# EAGLE board FGPMMOPA6x (EAGLE 6.3)
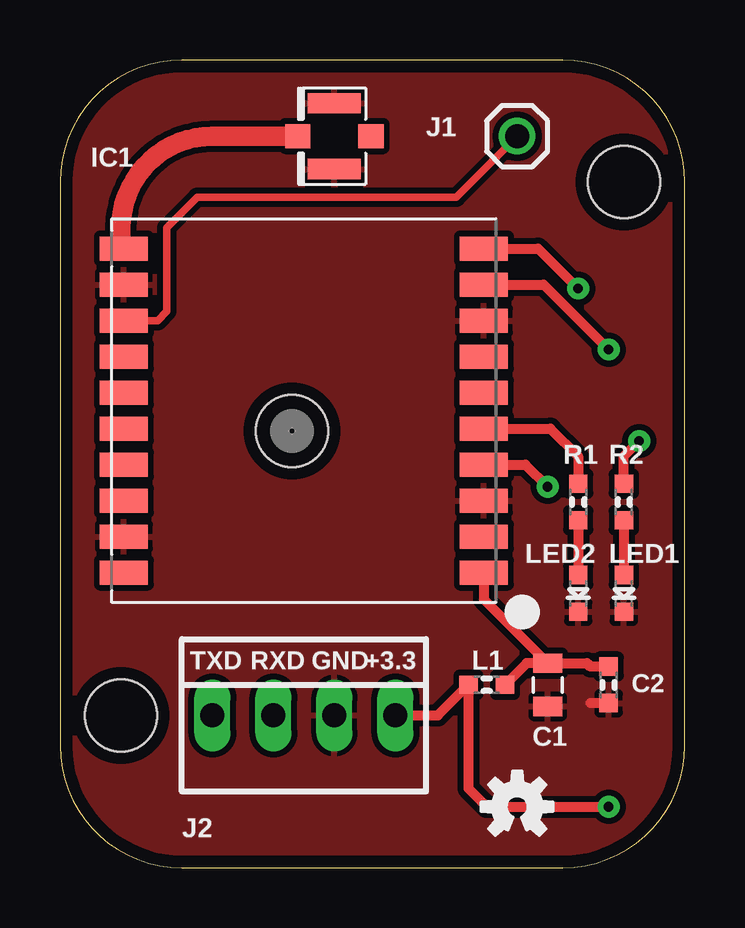
[diagram p0: board, top side]
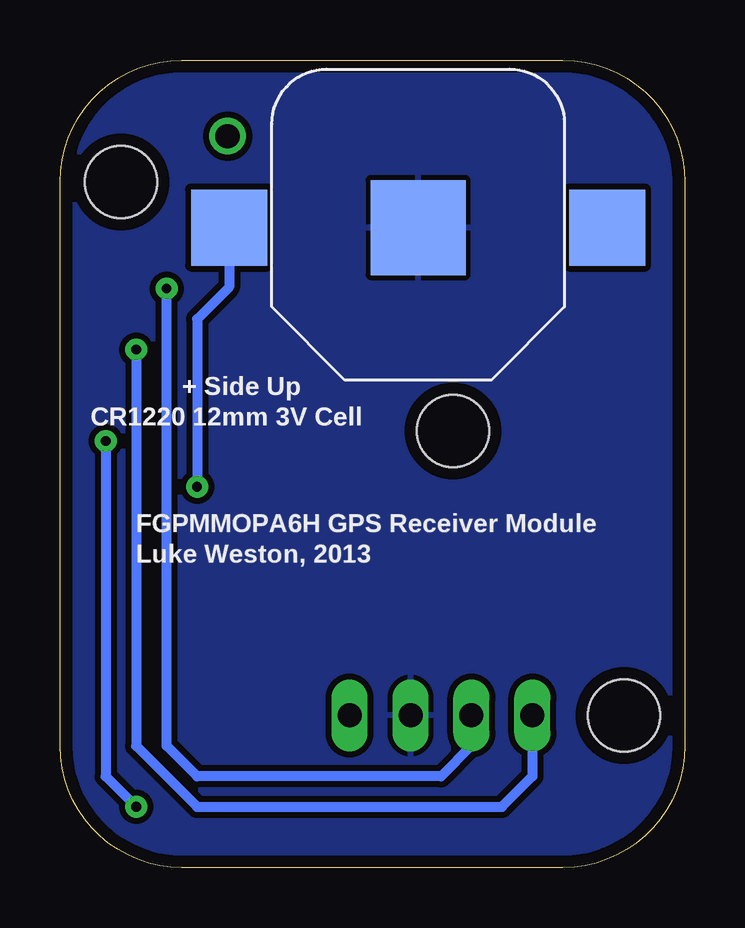
[diagram p1: board, bottom side, seen from below]

Size 26.04 x 33.65 mm. Coordinates in mm from the lower left corner, seen from the top.
Outline: 20.96,33.65 5.08,33.65 arc90 0,28.57 0,5.08 arc90 5.08,0 20.96,0 arc90 26.04,5.08 26.04,28.57 arc90 20.96,33.65
Copper layers (1*16): Top 0.035mm / dielectric 1.5mm / Bottom 0.035mm
Design rules "PCBCart-Standard *": minimum track width 8mil, minimum drill 0.4mm, track to track 8mil, track to pad 8mil, pad to pad 8mil, via to via 8mil, smd to smd 8mil, copper to edge 20mil, drill to drill 8mil, minimum pad ring 8mil, minimum via ring 10mil, stop-mask expansion 3mil, vias tented up to drill 16mil, thermal gap 8mil
Holes 3 mm at 2.54,6.35 23.5,28.57

## Footprints (pad centres in the part's own frame; a part is rotated, then mirrored left to right if it is on the bottom)
BATTCON_12MM = smd 3.962 x 3.962: GND 0,0 | smd 3.175 x 3.175: PWR@1 -7.874,0; PWR@2 7.874,0
0805 = smd 0.8 x 1.2: 1 -0.9,0; 2 0.9,0
0603 = smd 0.762 x 0.762: 1 -0.762,0; 2 0.762,0
FGPMMOPA6H = smd 2 x 1: P$1 -7.5,6.75; P$2 -7.5,5.25; P$3 -7.5,3.75; P$4 -7.5,2.25; P$5 -7.5,0.75; P$6 -7.5,-0.75; P$7 -7.5,-2.25; P$8 -7.5,-3.75; P$9 -7.5,-5.25; P$10 -7.5,-6.75; P$11 7.5,-6.75; P$12 7.5,-5.25; P$13 7.5,-3.75; P$14 7.5,-2.25; P$15 7.5,-0.75; P$16 7.5,0.75; P$17 7.5,2.25; P$18 7.5,3.75; P$19 7.5,5.25; P$20 7.5,6.75 | hole 3: 0.5,0.85
1X01 = drill 1.016: 1 0,0
22-23-2041 = drill 1 long: 1 -3.81,0; 2 -1.27,0; 3 1.27,0; 4 3.81,0
U.FL = smd 2.2 x 0.85: P$1 0,1.375; P$2 0,-1.375 | smd 1.05 x 1: P$3 1.525,0; P$4 -1.525,0
LED-0603 = smd 0.762 x 0.762: A -0.762,0; C 0.762,0

## Placement (x,y rotation side)
B1  Keystone 3000  [BATTCON_12MM]  11.11,26.67 0 bottom
C1  10µF  [0805]  20.32,7.62 90 top
C2  100nF  [0603]  22.86,7.62 90 top
IC1  FGPMMOPA6H  [FGPMMOPA6H]  10.16,19.05 180 top
J1  PPS  [1X01]  19.05,30.48 0 top
J2  Interface  [22-23-2041]  10.16,6.35 0 top
J3  U.FL  [U.FL]  11.43,30.48 180 top
L1  Bead  [0603]  17.78,7.62 180 top
LED1  Power  [LED-0603]  23.5,11.43 270 top
LED2  Status  [LED-0603]  21.59,11.43 270 top
R1  1kΩ  [0603]  21.59,15.24 90 top
R2  1kΩ  [0603]  23.5,15.24 90 top
SY  OSHW-LOGOS  [OSHW-LOGO-S]  19.05,2.54 0 top

## Library data of the parts
B1 SY = SparkFun
C1 = freetronics-master-v1; PACKAGE: 0805
C2 L1 R1 R2 = freetronics-master-v1; PACKAGE: 0603
IC1 J3 = microbuilder
J1 = freetronics-master-v1
J2 = con-molex; MF: MOLEX; MPN: 22-23-2041; OC_FARNELL: 1462920; OC_NEWARK: 38C0355
LED1 = freetronics-master-v1; COLOUR: Blue; PACKAGE: 0603
LED2 = freetronics-master-v1; COLOUR: Yellow; PACKAGE: 0603

## Nets
+3V3: J2.4 L1.2 R2.2
GND: B1.GND C1.1 C2.1 IC1.P$3 IC1.P$8 IC1.P$12 IC1.P$19 J2.3 J3.P$1 J3.P$2 LED1.C LED2.C
N$8: C1.2 C2.2 IC1.P$1 L1.1
N$10: B1.PWR@1 IC1.P$4
N$13: IC1.P$5 R1.2
N$14: IC1.P$9 J2.1
N$15: IC1.P$10 J2.2
N$16: IC1.P$13 J1.1
N$17: IC1.P$11 J3.P$3
N$19: LED2.A R1.1
N$20: LED1.A R2.1

## Tracks (layer width: path | path; a pad name or v marks a point on that pad's centre or on a via)
+3V3  (via drill 0.4)
  Top 0.406: R2.2 23.5,17.14 v24.13,17.78 | v22.86,2.54 17.78,2.54 17.02,3.3 L1.2 15.75,6.35 J2.4
  Bottom 0.406: v24.13,17.78 24.13,3.81 v22.86,2.54
GND
  Top 0.406: C2.1 22.1,6.86
  pour Bottom (isolate 0.254): -1.27,35.56 27.94,35.56 27.94,-1.27 -1.27,-1.27
  pour Top (isolate 0.254): -1.27,35.56 27.94,35.56 27.94,-1.27 -1.27,-1.27
N$8
  Top 0.406: C1.2 19.44,8.52 L1.1 | C2.2 22.1,8.38 21.96,8.52 C1.2 | IC1.P$1 17.66,11.18 C1.2
N$10  (via drill 0.4)
  Top 0.406: IC1.P$4 19.39,16.8 v20.32,15.88
  Bottom 0.406: B1.PWR@1 18.99,24.19 20.32,22.86 v20.32,15.88
N$13
  Top 0.406: IC1.P$5 20.43,18.3 21.59,17.14 R1.2
N$14  (via drill 0.4)
  Top 0.406: IC1.P$9 20.15,24.3 v22.86,21.59
  Bottom 0.406: v22.86,21.59 22.86,5.08 20.32,2.54 7.62,2.54 6.35,3.81 J2.1
N$15  (via drill 0.4)
  Top 0.406: IC1.P$10 19.92,25.8 v21.59,24.13
  Bottom 0.406: v21.59,24.13 21.59,5.08 20.32,3.81 10.16,3.81 8.89,5.08 J2.2
N$16
  Top 0.305: IC1.P$13 4.07,22.8 4.45,23.18 4.45,26.67 5.71,27.94 16.51,27.94 J1.1
N$17
  Top 0.406: IC1.P$11 arc-90 2.54,25.92
  Top 0.813: 2.54,25.92 2.54,26.67 arc-90 6.35,30.48 J3.P$3
N$19
  Top 0.406: R1.1 LED2.A
N$20
  Top 0.406: R2.1 LED1.A

## Text on the board
tPlace: TXD | RXD | GND | +3.3
bPlace: + Side Up | CR1220 12mm 3V Cell | FGPMMOPA6H GPS Receiver Module | Luke Weston, 2013